# Altium PCB Avalon_ctrlunit.PcbDoc (part 4 of 6)
Units mil, origin at the board's own origin, x right, y up, seen from the top; angles counter-clockwise.
Board outline 3947.62 x 3160.22 mil, 4 copper layers (Top Layer, Mid-Layer 1, Mid-Layer 2, Bottom Layer); 194 components, 260 nets, 936 pads, 465 vias.
Unrouted connection lines stored in the file: 1.
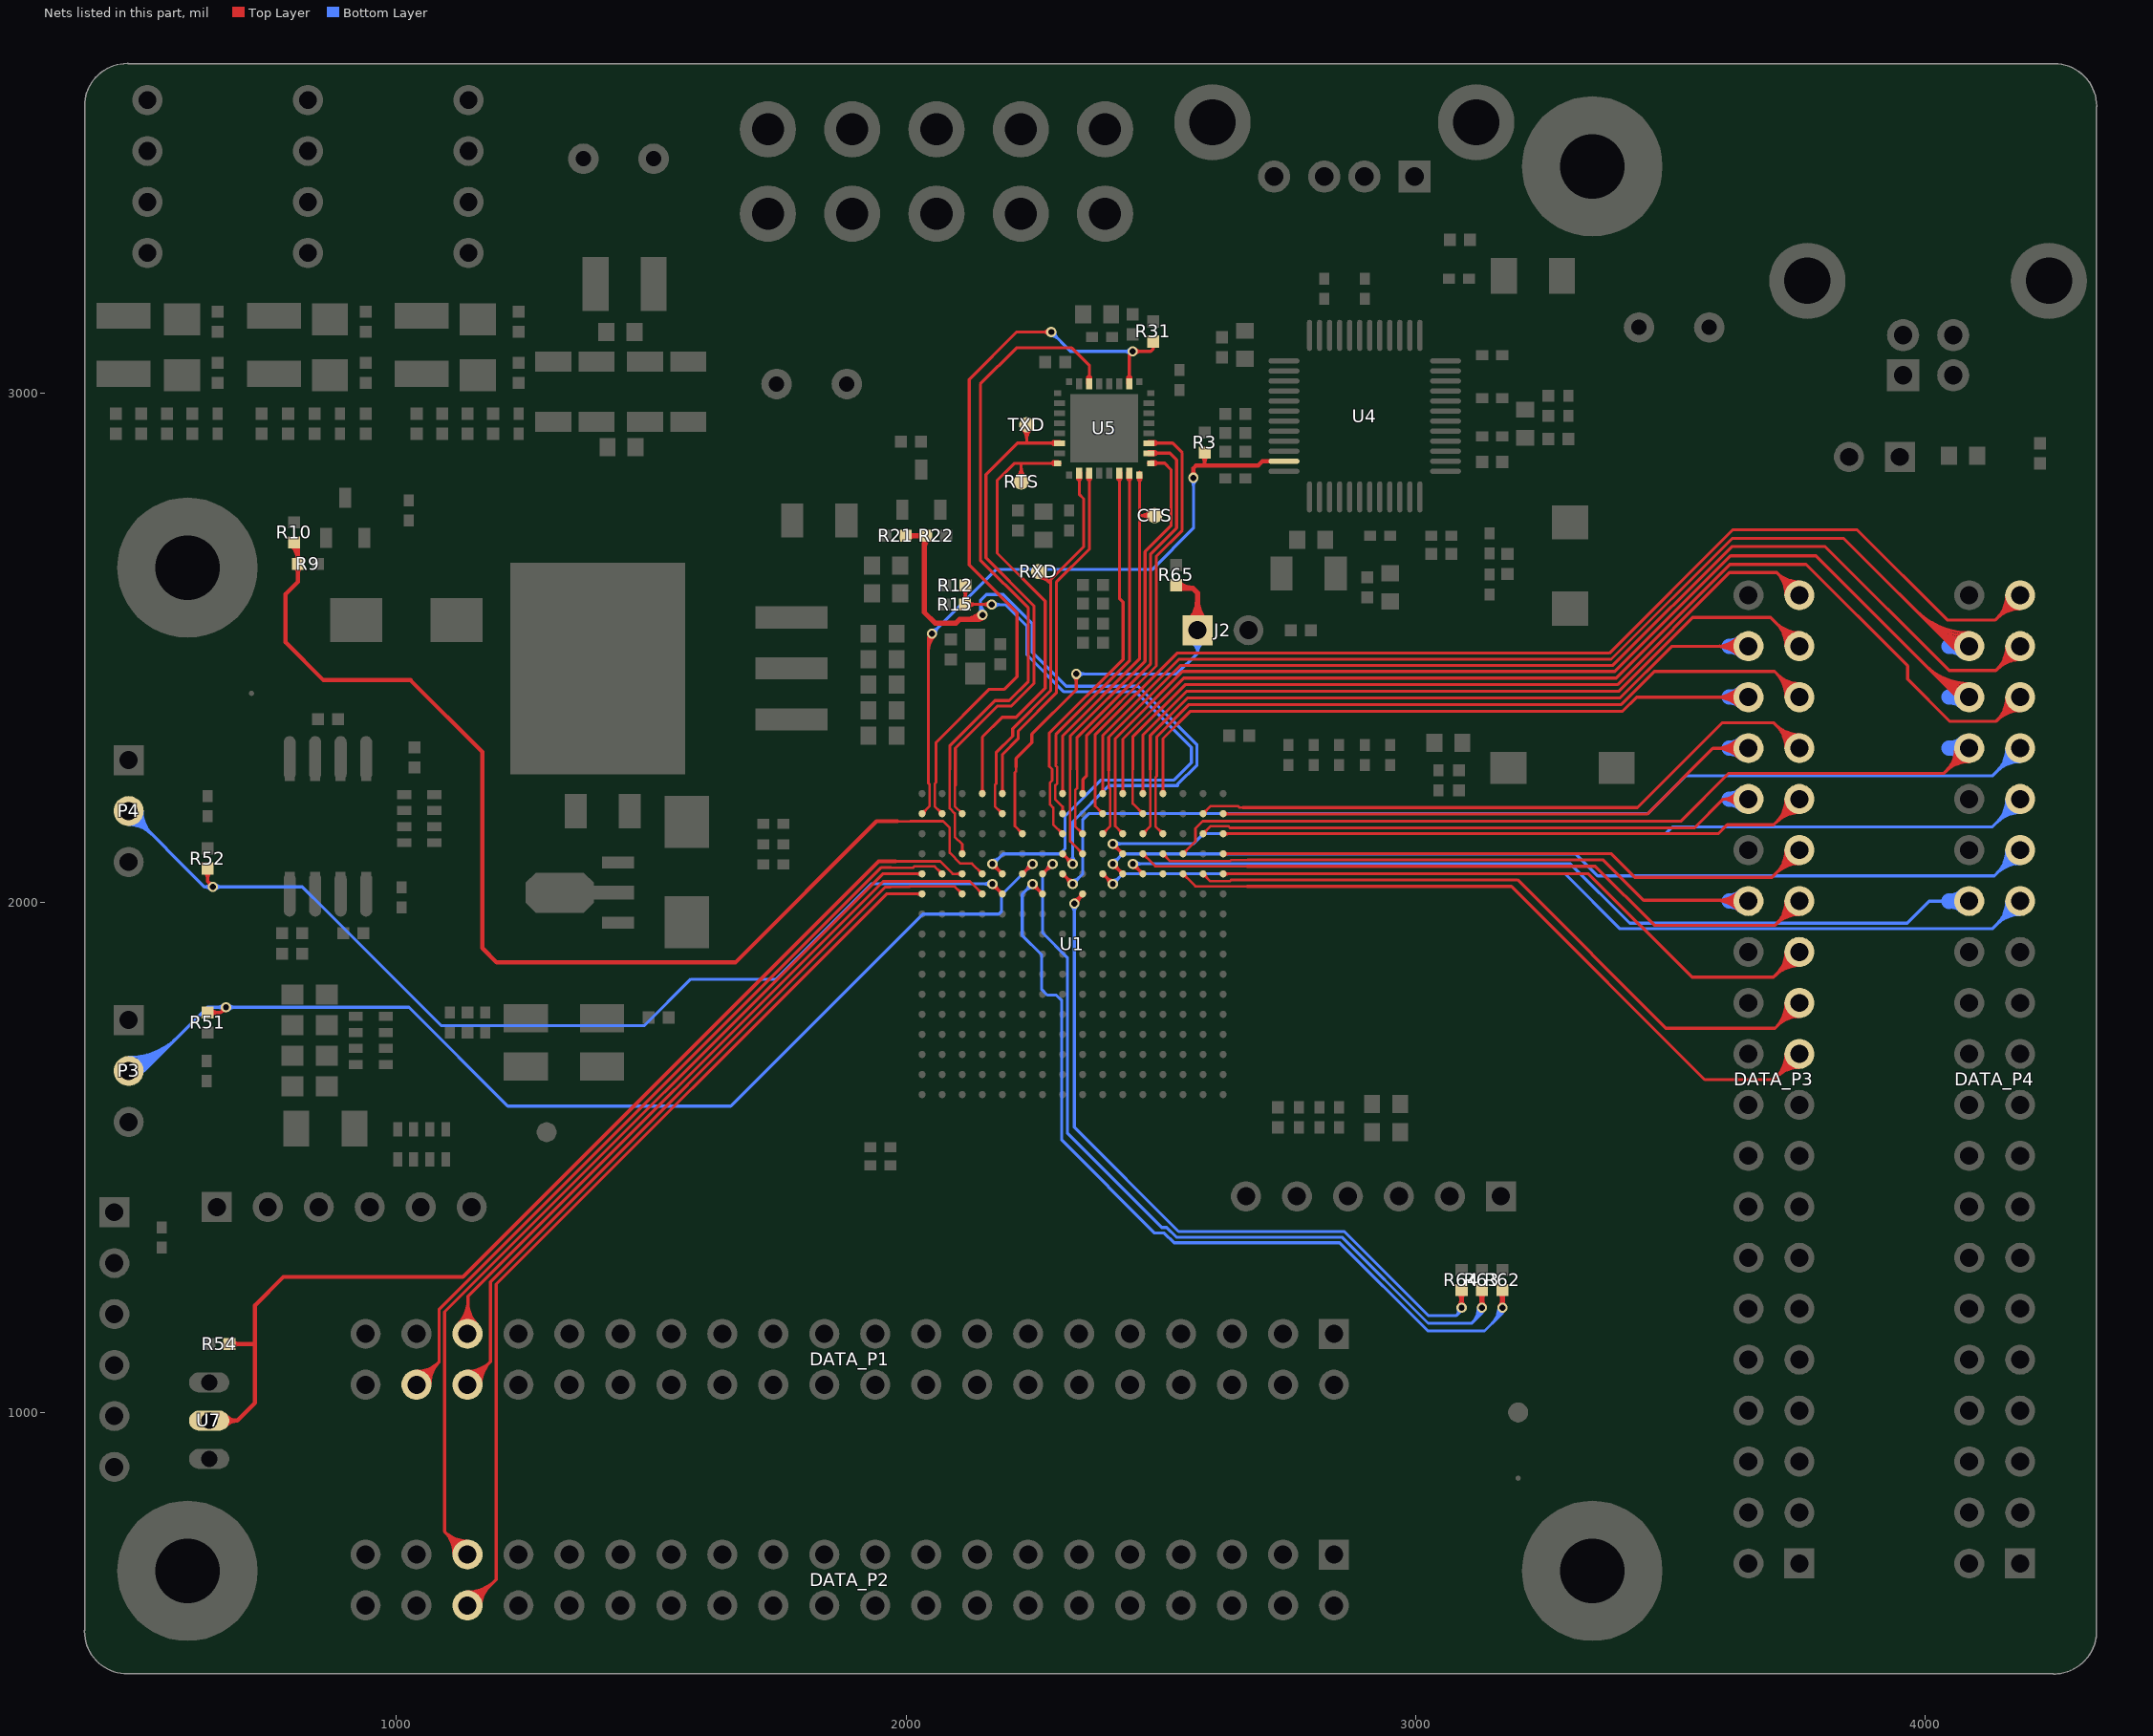
[diagram p6: the nets of this part, all layers, seen from the top]

## Via types
v1: diameter 20, hole 12, Top Layer to Bottom Layer, tented both sides, 334 vias
v2: diameter 32, hole 18, Top Layer to Bottom Layer, tented both sides, 84 vias
v3: diameter 50, hole 28, Top Layer to Bottom Layer, 32 vias
v4: diameter 25.98, hole 12.99, Top Layer to Bottom Layer, tented both sides, 9 vias
v5: diameter 50, hole 28, Top Layer to Bottom Layer, tented both sides, 6 vias

## Nets (pads, with @x,y where several pads share a name; then routed paths per layer and width w, separated by ;. In a path a pad name is that pad's centre, name@x,y a point inside that pad or via, vN(x,y) a via of type N, cw(c..) or ccw(c..) an arc to the next point about the centre after c; other vN are vias at no path point) (continued)
FPGA_L8: R64.2 U1.L8 | length 1585
  Top Layer w6: v1@2329.24,2005.23 ccw(c2326.31,2024.2) U1.L8@2342.93,2014.6 ; v1(2330.31,1998.31) U1.L8@2350,2018 ; v1@2330.31,2005.31 ccw(c2330.31,2022.21) 2342.26,2010.26 ccw(c2354.21,1998.31) v1@2337.31,1998.31 ; v1@2332.53,2004.96 ccw(c2334.18,2009.93) 2338.72,2007.31 ; 2337.92,2005.92 ccw(c2326.41,2017.43) U1.L8@2342.68,2017.43 ; v1@2337.08,2000.13 cw(c2344.22,2002.04) 2337.82,2005.74 ccw(c2344.22,2002.04) v1@2337.08,2000.13
  Top Layer w10: R64.2@3085.18,1235.5 cw(c3073.56,1223.87) 3090,1223.87 cw(c3106.44,1223.87) R64.2@3094.82,1235.5 ; v1@3086.46,1209.17 ccw(c3077.93,1217.7) 3090,1217.7 ccw(c3102.07,1217.7) v1@3093.54,1209.17 ; v1(3090,1205.63) R64.2@3090,1240.31
  Bottom Layer w6: v1@2325.37,1993.37 cw(c2313.42,1981.42) 2330.31,1981.42 cw(c2347.21,1981.42) v1@2335.26,1993.37 ; v1(2330.31,1998.31) 2330.31,1559.69 2535,1355 2860,1355 3025,1190 3080,1190 ; v1@3083.32,1203.53 cw(c3070.49,1199.51) 3080,1190 ; v1(3090,1205.63) 3090,1200 3080,1190
FPGA_L10: R62.2 U1.L10 | length 1840.1
  Top Layer w6: v1@2248.26,2030.11 cw(c2248.26,2013.21) 2260.21,2025.16 cw(c2272.16,2037.11) v1@2255.26,2037.11 ; v1(2248.26,2037.11) U1.L10@2267.94,2017.43 ; U1.L10@2263.94,2017.43 ccw(c2254.29,2017.43) 2261.12,2024.25 ccw(c2267.94,2031.08) U1.L10@2267.94,2021.43
  Top Layer w10: R62.2@3165.18,1235.5 cw(c3153.56,1223.87) 3170,1223.87 cw(c3186.44,1223.87) R62.2@3174.82,1235.5 ; v1@3166.46,1209.17 ccw(c3157.93,1217.7) 3170,1217.7 ccw(c3182.07,1217.7) v1@3173.54,1209.17 ; v1(3170,1205.63) R62.2@3170,1240.31
  Bottom Layer w6: v1@2241.26,2037.11 cw(c2224.36,2037.11) 2236.31,2025.16 cw(c2248.26,2013.21) v1@2248.26,2030.11 ; v1(2248.26,2037.11) 2228,2016.85 2228,1936 2266.26,1897.74 2266.26,1829.74 2277.11,1818.89 2295.09,1818.89 2305.63,1808.35 2305.63,1534.37 2488,1352 2506.89,1352 2525.89,1333 2850.89,1333 3023.89,1160 3135,1160 3170,1195 ; 3150.53,1175.53 ccw(c3120.44,1205.63) v1@3163,1205.63 ; 3160.78,1185.78 ccw(c3140.92,1205.63) v1@3169,1205.63 ; v1@3167.23,1199.2 cw(c3165.43,1195) 3170,1195 ; v1(3170,1205.63) 3170,1195 ; v1@3172.77,1199.2 ccw(c3174.57,1195) 3170,1195
FPGA_L12: P4.2 R52.2 U1.L12 | length 2460.8
  Top Layer w6: R52.2@623.77,2061.08 cw(c608.73,2046.04) 630,2046.04 cw(c651.27,2046.04) R52.2@636.23,2061.08 ; R52.2@630,2067.31 630,2041.63 ; v1@633.36,2032.08 ccw(c621.73,2033.36) 630,2041.63 ; v1@639.55,2038.27 cw(c638.27,2049.9) 630,2041.63 ; v1(640.31,2031.31) 630,2041.63 ; v1@2169.52,2030.11 cw(c2169.52,2013.21) 2181.47,2025.16 cw(c2193.42,2037.11) v1@2176.52,2037.11 ; v1(2169.52,2037.11) U1.L12@2189.2,2017.43 ; U1.L12@2185.2,2017.43 ccw(c2175.55,2017.43) 2182.38,2024.25 ccw(c2189.2,2031.08) U1.L12@2189.2,2021.43
  Bottom Layer w6: P4.2@475,2153.47 cw(c475,2089.43) 520.29,2134.71 cw(c565.57,2180) P4.2@501.53,2180 ; P4.2@475,2159.47 cw(c475,2109.91) 510.04,2144.96 cw(c545.09,2180) P4.2@495.53,2180 ; P4.2@475,2165.47 cw(c475,2130.4) 499.8,2155.2 cw(c524.6,2180) P4.2@489.53,2180 ; P4.2@475,2180 623.69,2031.31 ; v1@635.31,2026.42 ccw(c623.69,2015.06) 623.69,2031.31 ; v1@635.31,2036.21 cw(c623.69,2047.57) 623.69,2031.31 ; v1@645.26,2026.37 cw(c657.21,2014.42) 657.21,2031.31 cw(c657.21,2048.21) v1@645.26,2036.26 ; v1@2164.57,2032.16 ccw(c2152.62,2020.21) 2152.62,2037.11 ccw(c2152.62,2054.01) v1@2164.57,2042.06 ; v1(2169.52,2037.11) 1932.11,2037.11 1745,1850 1578,1850 1487,1759 1088,1759 861,1986 815.69,2031.31 v1(640.31,2031.31) 623.69,2031.31
FPGA_L13: DATA_P1.35 U1.L13 | length 1680.4
  Top Layer w5: 1970,2042 2125.26,2042 U1.L13@2149.83,2017.43 ; U1.L13@2145.33,2017.43 ccw(c2134.47,2017.43) 2142.15,2025.11 ccw(c2149.83,2032.79) U1.L13@2149.83,2021.93
  Top Layer w6: DATA_P1.35@1121.01,1173.12 ccw(c1072.74,1221.39) 1141,1221.39 ; DATA_P1.35@1125.25,1168.88 ccw(c1087.22,1206.9) 1141,1206.9 ; DATA_P1.35@1129.49,1164.63 ccw(c1101.71,1192.42) 1141,1192.42 ; DATA_P1.35@1141,1154.36 1141,1227.92 1955.08,2042 1970,2042 ; 1141,1186.45 ccw(c1171.85,1186.45) DATA_P1.35@1150.04,1164.63 ; 1141,1200.94 ccw(c1186.34,1200.94) DATA_P1.35@1154.28,1168.88 ; 1141,1215.42 ccw(c1200.82,1215.42) DATA_P1.35@1158.52,1173.12
FPGA_L14: DATA_P1.36 U1.L14 | length 1723.7
  Top Layer w5: 1970,2031 2006,2031 2007,2032 2095.89,2032 U1.L14@2110.46,2017.43 ; U1.L14@2105.96,2017.43 ccw(c2095.1,2017.43) 2102.78,2025.11 ccw(c2110.46,2032.79) U1.L14@2110.46,2021.93
  Top Layer w6: DATA_P1.36@1139.76,1054.36 1185,1099.6 ; DATA_P1.36@1139.78,1068.89 ccw(c1139.8,1103.87) 1164.54,1079.13 ccw(c1189.27,1054.4) DATA_P1.36@1154.29,1054.37 ; DATA_P1.36@1139.78,1074.89 ccw(c1139.82,1124.31) 1174.77,1089.37 ccw(c1209.71,1054.42) DATA_P1.36@1160.29,1054.38 ; DATA_P1.36@1139.79,1080.89 ccw(c1139.84,1144.76) 1185,1099.6 ; DATA_P1.36@1166.29,1054.38 cw(c1230.16,1054.43) 1185,1099.6 ; 1970,2031 1959.64,2031 1185,1256.36 1185,1099.6
FPGA_L16: DATA_P2.36 U1.L16 | length 2066.6
  Top Layer w6: DATA_P2.36@1139.76,629.82 ccw(c1139.76,663.75) 1163.76,639.76 ; DATA_P2.36@1139.76,635.82 ccw(c1139.76,684.24) 1174,650 ; DATA_P2.36@1139.76,641.82 ccw(c1139.76,704.72) 1184.24,660.24 ; DATA_P2.36@1139.76,647.82 ccw(c1139.76,725.21) 1194.49,670.49 ; DATA_P2.36@1142.53,618.53 1196,672 1196,1251.8 1961.62,2017.43 U1.L16@2031.72,2017.43 ; DATA_P2.36@1160.29,621.29 cw(c1196.5,621.29) 1170.9,646.9 ; DATA_P2.36@1166.29,621.29 cw(c1216.99,621.29) 1181.14,657.14 ; U1.L16@2028.9,2014.6 ccw(c2022.07,2007.77) 2022.07,2017.43 ccw(c2022.07,2027.08) U1.L16@2028.9,2020.25
FPGA_M1: DATA_P3.25 U1.M1 | length 1483.4
  Top Layer w6: U1.M1@2622.28,2056.8 3339.2,2056.8 3542,1854 3702,1854 DATA_P3.25@3752.17,1904.17 ; U1.M1@2625.1,2053.97 cw(c2631.93,2047.14) 2631.93,2056.8 cw(c2631.93,2066.45) U1.M1@2625.1,2059.62 ; 3705.38,1857.38 cw(c3752.79,1809.97) DATA_P3.25@3752.79,1877.02 ; 3708.38,1860.38 ccw(c3665.22,1903.54) DATA_P3.25@3726.26,1903.54 ; 3715.62,1867.62 cw(c3752.79,1830.45) DATA_P3.25@3752.79,1883.02 ; 3718.62,1870.62 ccw(c3685.71,1903.54) DATA_P3.25@3732.26,1903.54 ; 3725.86,1877.86 cw(c3752.79,1850.94) DATA_P3.25@3752.79,1889.02 ; 3728.87,1880.87 ccw(c3706.19,1903.54) DATA_P3.25@3738.26,1903.54
FPGA_M2: DATA_P3.23 U1.M2 | length 1569.2
  Top Layer w5: U1.M2@2582.91,2052.3 cw(c2582.91,2041.43) 2590.59,2049.11 cw(c2598.27,2056.8) U1.M2@2587.41,2056.8 ; U1.M2@2582.91,2056.8 2597.41,2042.3 2635.3,2042.3 2638,2045 2670,2045
  Top Layer w6: 2670,2045 3200,2045 3491,1754 3705,1754 DATA_P3.23@3753.67,1802.67 ; 3706.26,1755.26 ccw(c3657.98,1803.54) DATA_P3.23@3726.26,1803.54 ; 3710.5,1759.5 cw(c3752.79,1717.21) DATA_P3.23@3752.79,1777.02 ; 3716.5,1765.5 ccw(c3678.46,1803.54) DATA_P3.23@3732.26,1803.54 ; 3720.74,1769.74 cw(c3752.79,1737.7) DATA_P3.23@3752.79,1783.02 ; 3726.75,1775.75 ccw(c3698.95,1803.54) DATA_P3.23@3738.26,1803.54 ; 3730.98,1779.98 cw(c3752.79,1758.18) DATA_P3.23@3752.79,1789.02
FPGA_M3: DATA_P3.21 U1.M3 | length 1648.3
  Top Layer w5: U1.M3@2543.54,2052.3 cw(c2543.54,2041.43) 2551.22,2049.11 cw(c2558.9,2056.8) U1.M3@2548.04,2056.8 ; U1.M3@2543.54,2056.8 2568.04,2032.3 2669,2032.3
  Top Layer w6: 2669,2032.3 3187.7,2032.3 3567,1653 3703,1653 DATA_P3.21@3753.17,1703.17 ; 3706.97,1656.97 ccw(c3660.39,1703.54) DATA_P3.21@3726.26,1703.54 ; 3708.79,1658.79 cw(c3752.79,1614.8) DATA_P3.21@3752.79,1677.02 ; 3717.21,1667.21 ccw(c3680.88,1703.54) DATA_P3.21@3732.26,1703.54 ; 3719.04,1669.04 cw(c3752.79,1635.28) DATA_P3.21@3752.79,1683.02 ; 3727.45,1677.45 ccw(c3701.36,1703.54) DATA_P3.21@3738.26,1703.54 ; 3729.28,1679.28 cw(c3752.79,1655.77) DATA_P3.21@3752.79,1689.02
FPGA_M4: U1.M4
FPGA_M5: DATA_P4.28 U1.M5 | length 1868.1
  Top Layer w6: v1@2445.11,2069.48 cw(c2445.11,2052.58) 2457.06,2064.53 cw(c2469.01,2076.48) v1@2452.11,2076.48 ; v1(2445.11,2076.48) U1.M5@2464.8,2056.8 ; U1.M5@2460.8,2056.8 ccw(c2451.14,2056.8) 2457.97,2063.62 ccw(c2464.8,2070.45) U1.M5@2464.8,2060.8
  Bottom Layer w6: v1(2445.11,2076.48) 3303.52,2076.48 3420,1960 3964,1960 4007,2003 4046,2003 ; v1@2450.06,2071.53 cw(c2462.01,2059.58) 2462.01,2076.48 cw(c2462.01,2093.38) v1@2450.06,2081.43 ; DATA_P4.28@4078,2002 DATA_P4.28@4085,1995
  Bottom Layer w30: 4046,2003 4046.54,2003.54 DATA_P4.28@4085.86,2003.54 ; DATA_P4.28@4075.59,1993.27 ccw(c4050.79,1968.47) 4050.79,2003.54 ccw(c4050.79,2038.62) DATA_P4.28@4075.59,2013.82
FPGA_M6: DATA_P4.29 U1.M6 | length 2156.6
  Top Layer w6: v1@2405.74,2069.48 cw(c2405.74,2052.58) 2417.69,2064.53 cw(c2429.64,2076.48) v1@2412.74,2076.48 ; v1(2405.74,2076.48) U1.M6@2425.43,2056.8 ; U1.M6@2421.43,2056.8 ccw(c2411.77,2056.8) 2418.6,2063.62 ccw(c2425.43,2070.45) U1.M6@2425.43,2060.8
  Bottom Layer w6: v1(2405.74,2076.48) 2425.26,2096 3314,2096 3357,2053 4135.31,2053 DATA_P4.29@4185.86,2103.54 ; v1@2405.74,2083.48 ccw(c2405.74,2100.38) 2417.69,2088.43 ccw(c2429.64,2076.48) v1@2412.74,2076.48 ; DATA_P4.29@4159.33,2103.54 cw(c4095.29,2103.54) 4140.57,2058.26 cw(c4185.86,2012.97) DATA_P4.29@4185.86,2077.02 ; DATA_P4.29@4165.33,2103.54 cw(c4115.77,2103.54) 4150.82,2068.5 cw(c4185.86,2033.46) DATA_P4.29@4185.86,2083.02 ; DATA_P4.29@4171.33,2103.54 cw(c4136.26,2103.54) 4161.06,2078.74 cw(c4185.86,2053.94) DATA_P4.29@4185.86,2089.02
FPGA_M7: DATA_P4.27 U1.M7 | length 2185.3
  Top Layer w6: U1.M7@2386.06,2052.8 cw(c2386.06,2043.14) 2392.88,2049.97 cw(c2399.71,2056.8) U1.M7@2390.06,2056.8 ; U1.M7@2386.06,2056.8 v1(2405.74,2037.11) ; v1@2398.74,2037.11 ccw(c2381.84,2037.11) 2393.79,2049.06 ccw(c2405.74,2061.01) v1@2405.74,2044.11
  Bottom Layer w6: v1(2405.74,2037.11) 2425.63,2057 3293,2057 3401,1949 4131.31,1949 DATA_P4.27@4185.86,2003.54 ; v1@2405.74,2044.11 ccw(c2405.74,2061.01) 2417.69,2049.06 ccw(c2429.64,2037.11) v1@2412.74,2037.11 ; DATA_P4.27@4159.33,2003.54 cw(c4095.29,2003.54) 4140.57,1958.26 cw(c4185.86,1912.97) DATA_P4.27@4185.86,1977.02 ; DATA_P4.27@4165.33,2003.54 cw(c4115.77,2003.54) 4150.82,1968.5 cw(c4185.86,1933.46) DATA_P4.27@4185.86,1983.02 ; DATA_P4.27@4171.33,2003.54 cw(c4136.26,2003.54) 4161.06,1978.74 cw(c4185.86,1953.94) DATA_P4.27@4185.86,1989.02
FPGA_M9: DATA_P4.33 U1.M9 | length 2361.1
  Top Layer w6: U1.M9@2307.32,2052.8 cw(c2307.32,2043.14) 2314.14,2049.97 cw(c2320.97,2056.8) U1.M9@2311.32,2056.8 ; U1.M9@2307.32,2056.8 v1(2327,2037.11) ; v1@2320,2037.11 ccw(c2303.1,2037.11) 2315.05,2049.06 ccw(c2327,2061.01) v1@2327,2044.11
  Bottom Layer w6: v1(2327,2037.11) 2347,2057.11 2347,2163.44 2358.56,2175 3455,2175 3529,2249 4131.31,2249 DATA_P4.33@4185.86,2303.54 ; v1@2327,2044.11 ccw(c2327,2061.01) 2338.95,2049.06 ccw(c2350.9,2037.11) v1@2334,2037.11 ; DATA_P4.33@4159.33,2303.54 cw(c4095.29,2303.54) 4140.57,2258.26 cw(c4185.86,2212.97) DATA_P4.33@4185.86,2277.02 ; DATA_P4.33@4165.33,2303.54 cw(c4115.77,2303.54) 4150.82,2268.5 cw(c4185.86,2233.46) DATA_P4.33@4185.86,2283.02 ; DATA_P4.33@4171.33,2303.54 cw(c4136.26,2303.54) 4161.06,2278.74 cw(c4185.86,2253.94) DATA_P4.33@4185.86,2289.02
FPGA_M10: R63.2 U1.M10 | length 1785
  Top Layer w6: U1.M10@2267.94,2056.8 v1(2287.63,2076.48) ; U1.M10@2267.94,2060.8 ccw(c2267.94,2070.45) 2274.77,2063.62 ccw(c2281.6,2056.8) U1.M10@2271.94,2056.8 ; v1@2280.63,2076.48 cw(c2263.73,2076.48) 2275.68,2064.53 cw(c2287.63,2052.58) v1@2287.63,2069.48
  Top Layer w10: R63.2@3125.18,1235.5 cw(c3113.56,1223.87) 3130,1223.87 cw(c3146.44,1223.87) R63.2@3134.82,1235.5 ; v1@3126.46,1209.17 ccw(c3117.93,1217.7) 3130,1217.7 ccw(c3142.07,1217.7) v1@3133.54,1209.17 ; v1(3130,1205.63) R63.2@3130,1240.31
  Bottom Layer w6: v1@2280.63,2076.48 cw(c2263.73,2076.48) 2275.68,2064.53 cw(c2287.63,2052.58) v1@2287.63,2069.48 ; v1(2287.63,2076.48) 2268,2056.85 2268,1941 2316.63,1892.37 2316.63,1548.37 2502,1363 2511.44,1363 2530.44,1344 2855.44,1344 3024.44,1175 3110,1175 3130,1195 ; 3110.53,1175.53 ccw(c3080.44,1205.63) v1@3123,1205.63 ; 3120.78,1185.78 ccw(c3100.92,1205.63) v1@3129,1205.63 ; v1@3127.23,1199.2 cw(c3125.43,1195) 3130,1195 ; v1(3130,1205.63) 3130,1195 ; v1@3132.77,1199.2 ccw(c3134.57,1195) 3130,1195
FPGA_M11: P3.2 R51.2 U1.M11 | length 2887.1
  Top Layer w6: R51.2@630,1784.69 655.69,1784.69 ; R51.2@636.23,1778.45 cw(c651.27,1763.41) 651.27,1784.69 cw(c651.27,1805.96) R51.2@636.23,1790.92 ; v1@659.04,1794.24 cw(c647.41,1792.96) 655.69,1784.69 ; v1@665.24,1788.04 ccw(c663.96,1776.41) 655.69,1784.69 ; v1(666,1795) 655.69,1784.69 ; U1.M11@2228.57,2056.8 v1(2248.26,2076.48) ; U1.M11@2228.57,2060.8 ccw(c2228.57,2070.45) 2235.4,2063.62 ccw(c2242.23,2056.8) U1.M11@2232.57,2056.8 ; v1@2241.26,2076.48 cw(c2224.36,2076.48) 2236.31,2064.53 cw(c2248.26,2052.58) v1@2248.26,2069.48
  Bottom Layer w6: P3.2@475,1660.53 ccw(c475,1710.09) 510.04,1675.04 ; P3.2@475,1666.53 ccw(c475,1730.57) 520.29,1685.29 ; P3.2@475,1670 505,1670 ; P3.2@475,1672.53 ccw(c475,1751.06) 530.53,1695.53 ; P3.2@475,1678.53 ccw(c475,1771.54) 540.77,1705.77 ; P3.2@475,1684.53 ccw(c475,1792.03) 551.01,1716.01 ; P3.2@475,1690.53 ccw(c475,1812.51) 561.26,1726.26 ; P3.2@475,1696.53 ccw(c475,1833) 571.5,1736.5 ; P3.2@501.33,1666.75 cw(c505,1666.3) 505,1670 ; P3.2@501.33,1673.25 ccw(c505,1673.7) 505,1670 ; v1@661.05,1790.05 ccw(c649.1,1778.1) 649.1,1795 ccw(c649.1,1811.9) v1@661.05,1799.95 ; v1@670.95,1790.05 cw(c682.9,1778.1) 682.9,1795 cw(c682.9,1811.9) v1@670.95,1799.95 ; v1@2241.26,2076.48 cw(c2224.36,2076.48) 2236.31,2064.53 cw(c2248.26,2052.58) v1@2248.26,2069.48 ; v1(2248.26,2076.48) 2187.52,2015.74 2187.52,1983.52 2182,1978 2033,1978 1656,1601 1219,1601 1025,1795 v1(666,1795) 630,1795 505,1670
FPGA_M12: R12.1 R15.1 U1.M12 | length 1419.1
  Top Layer w6: R15.1@2109.45,2591.23 ccw(c2092,2608.69) 2116.69,2608.69 ; R12.1@2110.45,2616.77 cw(c2095.41,2601.73) 2116.68,2601.73 cw(c2137.96,2601.73) R12.1@2122.92,2616.77 ; 2116.68,2603.86 ccw(c2134.54,2603.86) 2121.92,2591.23 ccw(c2134.54,2603.86) 2134.54,2586 ; R12.1@2116.68,2623 2116.68,2586 2167,2586 v1(2168,2585) ; R15.1@2121.92,2578.77 cw(c2139.37,2561.31) 2139.37,2586 ; 2148.69,2586 cw(c2148.69,2565.69) v1@2163.05,2580.05 ; 2153.51,2586 ccw(c2153.51,2599.49) v1@2163.05,2589.95 ; v1@2169.52,2069.48 cw(c2169.52,2052.58) 2181.47,2064.53 cw(c2193.42,2076.48) v1@2176.52,2076.48 ; v1(2169.52,2076.48) U1.M12@2189.2,2056.8 ; U1.M12@2185.2,2056.8 ccw(c2175.55,2056.8) 2182.38,2063.62 ccw(c2189.2,2070.45) U1.M12@2189.2,2060.8
  Bottom Layer w6: v1(2168,2585) 2195,2585 2237,2543 2237,2487 2310,2414 2451,2414 2560,2305 2560,2275 2526,2241 2383,2241 2312,2170 2312,2106 2302,2096 2190.68,2096 2171.16,2076.48 v1(2169.52,2076.48) ; v1@2169.52,2083.48 ccw(c2169.52,2104.34) 2184.27,2089.59 ; v1@2172.95,2580.05 cw(c2184.9,2568.1) 2184.9,2585 cw(c2184.9,2601.9) v1@2172.95,2589.95 ; v1@2176.52,2076.48 cw(c2189.45,2076.48) 2180.31,2085.63
FPGA_M13: R9.1 R10.2 U1.M13 | length 2377.8
  Top Layer w5: 1983,2160 2009,2160 2009.04,2160.04 2072.96,2160.04 2085.96,2147.04 2085.96,2098.04 2107,2077 2129.63,2077 U1.M13@2149.83,2056.8 ; U1.M13@2145.33,2056.8 ccw(c2134.47,2056.8) 2142.15,2064.48 ccw(c2149.83,2072.16) U1.M13@2149.83,2061.3
  Top Layer w8: R10.2@794.48,2701.79 cw(c764.24,2671.56) R9.1@807,2671.56 ; R10.2@800,2709 807,2702 807,2630 783,2606 783,2511.15 857.15,2437 1028.15,2437 1169,2296.15 1169,1911.15 1197.15,1883 1665.17,1883 1942.17,2160 1983,2160 ; R10.2@800.13,2707.45 cw(c783.56,2690.87) 807,2690.87 ; R9.1@801.79,2659.48 cw(c789.22,2646.9) 807,2646.9 ; R9.1@801.79,2670.52 ccw(c789.22,2683.1) 807,2683.1 ; 807,2645.38 cw(c826.93,2645.38) R9.1@812.84,2659.48 ; 807,2684.62 ccw(c826.93,2684.62) R9.1@812.84,2670.52
FPGA_M14: R54.2 U1.M14 U7.2 | length 2204.4
  Top Layer w5: 1979.3,2081.3 2067.1,2081.3 2091.6,2056.8 U1.M14@2110.46,2056.8 ; U1.M14@2107.28,2053.61 ccw(c2099.6,2045.93) 2099.6,2056.8 ccw(c2099.6,2067.66) U1.M14@2107.28,2059.98
  Top Layer w8: U7.2@633,984 688,984 ; U7.2@664.32,973.48 cw(c688,952.09) 688,984 ; U7.2@664.32,994.52 ccw(c688,1015.91) 688,984 ; R54.2@672.69,1134 723,1134 ; R54.2@678.21,1128.48 cw(c691.54,1115.14) 691.54,1134 cw(c691.54,1152.86) R54.2@678.21,1139.52 ; 1979.3,2081.3 1946.3,2081.3 1130.71,1265.71 778.71,1265.71 723,1210 723,1134 ; 688,984 723,1019 723,1134
FPGA_M15: DATA_P1.38 U1.M15 | length 1761.5
  Top Layer w5: 1971,2069 2014,2069 2016.3,2071.3 2056.59,2071.3 U1.M15@2071.09,2056.8 ; U1.M15@2066.59,2056.8 ccw(c2055.73,2056.8) 2063.41,2064.48 ccw(c2071.09,2072.16) U1.M15@2071.09,2061.3
  Top Layer w6: DATA_P1.38@1039.76,1054.36 1084,1098.6 ; DATA_P1.38@1040.01,1068.89 ccw(c1040.56,1102.01) 1063.99,1078.59 ccw(c1087.41,1055.16) DATA_P1.38@1054.29,1054.61 ; DATA_P1.38@1040.11,1074.89 ccw(c1040.89,1121.69) 1073.99,1088.59 ccw(c1107.09,1055.49) DATA_P1.38@1060.29,1054.71 ; DATA_P1.38@1040.21,1080.89 ccw(c1041.22,1141.37) 1084,1098.6 ; DATA_P1.38@1066.29,1054.81 cw(c1126.77,1055.82) 1084,1098.6 ; 1971,2069 1950.97,2069 1084,1202.03 1084,1098.6
FPGA_M16: DATA_P2.35 U1.M16 | length 2032
  Top Layer w6: DATA_P2.35@1113.24,721.51 ccw(c1050.97,722.02) 1095,766.05 ; DATA_P2.35@1119.24,721.46 ccw(c1071.06,721.86) 1105.13,755.93 ccw(c1139.2,790) DATA_P2.35@1139.59,741.82 ; DATA_P2.35@1125.24,721.41 ccw(c1091.14,721.69) 1115.25,745.8 ccw(c1139.36,769.92) DATA_P2.35@1139.64,735.82 ; DATA_P2.35@1139.54,747.82 cw(c1139.03,810.08) 1095,766.05 ; DATA_P2.35@1139.76,721.29 1095,766.06 ; U1.M16@2028.9,2053.97 ccw(c2022.07,2047.14) 2022.07,2056.8 ccw(c2022.07,2066.45) U1.M16@2028.9,2059.62 ; U1.M16@2031.72,2056.8 1954.32,2056.8 1095,1197.47 1095,766.06
FPGA_N1: DATA_P3.29 U1.N1 | length 1420.5
  Top Layer w6: U1.N1@2622.28,2096.17 3383.83,2096.17 3430,2050 3699.24,2050 DATA_P3.29@3752.79,2103.54 ; U1.N1@2625.1,2093.34 cw(c2631.93,2086.51) 2631.93,2096.17 cw(c2631.93,2105.82) U1.N1@2625.1,2098.99 ; DATA_P3.29@3726.26,2103.54 cw(c3662.22,2103.54) 3707.5,2058.26 cw(c3752.79,2012.97) DATA_P3.29@3752.79,2077.02 ; DATA_P3.29@3732.26,2103.54 cw(c3682.7,2103.54) 3717.74,2068.5 cw(c3752.79,2033.46) DATA_P3.29@3752.79,2083.02 ; DATA_P3.29@3738.26,2103.54 cw(c3703.19,2103.54) 3727.99,2078.74 cw(c3752.79,2053.94) DATA_P3.29@3752.79,2089.02
FPGA_N3: DATA_P4.34 U1.N3 | length 1988.6
  Top Layer w5: U1.N3@2543.54,2096.17 2568,2120.63 2568,2146 2582.04,2160.04 2669,2160.04 ; U1.N3@2543.54,2100.67 ccw(c2543.54,2111.53) 2551.22,2103.85 ccw(c2558.9,2096.17) U1.N3@2548.04,2096.17
  Top Layer w6: 2669,2160.04 3520.04,2160.04 3614,2254 4029,2254 4036.32,2254 DATA_P4.34@4085.86,2303.54 ; DATA_P4.34@4059.33,2303.54 cw(c3995.29,2303.54) 4040.57,2258.26 cw(c4085.86,2212.97) DATA_P4.34@4085.86,2277.02 ; DATA_P4.34@4065.33,2303.54 cw(c4015.77,2303.54) 4050.82,2268.5 cw(c4085.86,2233.46) DATA_P4.34@4085.86,2283.02 ; DATA_P4.34@4071.33,2303.54 cw(c4036.26,2303.54) 4061.06,2278.74 cw(c4085.86,2253.94) DATA_P4.34@4085.86,2289.02
  Bottom Layer w30: 4046,2303.54 DATA_P4.34@4085.86,2303.54 ; DATA_P4.34@4075.59,2293.27 ccw(c4050.79,2268.47) 4050.79,2303.54 ccw(c4050.79,2338.62) DATA_P4.34@4075.59,2313.82
FPGA_N4: DATA_P3.28 U1.N4 | length 1531.8
  Top Layer w5: U1.N4@2504.17,2091.67 cw(c2504.17,2080.8) 2511.85,2088.48 cw(c2519.53,2096.17) U1.N4@2508.67,2096.17 ; U1.N4@2504.17,2096.17 2518.67,2081.67 2635.67,2081.67 2638,2084 2670.67,2084
  Top Layer w6: 2670.67,2084 3368,2084 3447,2005 DATA_P3.28@3652.79,2005 ; 3585.23,2005 cw(c3585.23,1935.98) DATA_P3.28@3634.03,1984.79 ; 3592.26,2005 ccw(c3592.26,2064.07) DATA_P3.28@3634.03,2022.3 ; 3599.71,2005 cw(c3599.71,1950.47) DATA_P3.28@3638.27,1989.03 ; 3606.75,2005 ccw(c3606.75,2049.58) DATA_P3.28@3638.27,2018.06 ; 3614.2,2005 cw(c3614.2,1964.95) DATA_P3.28@3642.51,1993.27 ; 3621.23,2005 ccw(c3621.23,2035.1) DATA_P3.28@3642.51,2013.82
  Bottom Layer w30: 3615,2003.54 DATA_P3.28@3652.79,2003.54 ; DATA_P3.28@3642.51,1993.27 ccw(c3617.71,1968.47) 3617.71,2003.54 ccw(c3617.71,2038.62) DATA_P3.28@3642.51,2013.82
FPGA_N5: DATA_P3.27 U1.N5 | length 1616.3
  Top Layer w5: U1.N5@2464.8,2091.67 cw(c2464.8,2080.8) 2472.48,2088.48 cw(c2480.16,2096.17) U1.N5@2469.3,2096.17 ; U1.N5@2464.8,2096.17 2489.3,2071.67 2669,2071.67
  Top Layer w6: 2669,2071.67 3352.33,2071.67 3468,1956 3699,1956 3705.24,1956 DATA_P3.27@3752.79,2003.54 ; DATA_P3.27@3726.26,2003.54 cw(c3662.22,2003.54) 3707.5,1958.26 cw(c3752.79,1912.97) DATA_P3.27@3752.79,1977.02 ; DATA_P3.27@3732.26,2003.54 cw(c3682.7,2003.54) 3717.74,1968.5 cw(c3752.79,1933.46) DATA_P3.27@3752.79,1983.02 ; DATA_P3.27@3738.26,2003.54 cw(c3703.19,2003.54) 3727.99,1978.74 cw(c3752.79,1953.94) DATA_P3.27@3752.79,1989.02
FPGA_N6: DATA_P4.31 U1.N6 | length 2146.1
  Top Layer w6: v1@2405.74,2108.85 cw(c2405.74,2091.95) 2417.69,2103.9 cw(c2429.64,2115.85) v1@2412.74,2115.85 ; v1(2405.74,2115.85) U1.N6@2425.43,2096.17 ; U1.N6@2421.43,2096.17 ccw(c2411.77,2096.17) 2418.6,2102.99 ccw(c2425.43,2109.82) U1.N6@2425.43,2100.17
  Bottom Layer w6: v1(2405.74,2115.85) 2563.85,2115.85 2584,2136 3491,2136 3504,2149 4131.31,2149 DATA_P4.31@4185.86,2203.54 ; v1@2410.69,2110.9 cw(c2422.64,2098.95) 2422.64,2115.85 cw(c2422.64,2132.75) v1@2410.69,2120.8 ; DATA_P4.31@4159.33,2203.54 cw(c4095.29,2203.54) 4140.57,2158.26 cw(c4185.86,2112.97) DATA_P4.31@4185.86,2177.02 ; DATA_P4.31@4165.33,2203.54 cw(c4115.77,2203.54) 4150.82,2168.5 cw(c4185.86,2133.46) DATA_P4.31@4185.86,2183.02 ; DATA_P4.31@4171.33,2203.54 cw(c4136.26,2203.54) 4161.06,2178.74 cw(c4185.86,2153.94) DATA_P4.31@4185.86,2189.02
FPGA_N8: U1.N8 U5.9 | length 931.1
  Top Layer w5: 2322.18,2262 2322.18,2120.67 U1.N8@2346.68,2096.17 ; U1.N8@2342.18,2096.17 ccw(c2331.32,2096.17) 2339,2103.85 ccw(c2346.68,2111.53) U1.N8@2346.68,2100.67
  Top Layer w6: 2322.18,2262 2322.18,2327.1 2469.03,2473.95 2469.03,2689.03 2520,2740 2520,2850 2507.44,2862.56 U5.9@2475.75,2862.56 ; U5.9@2483.57,2860.06 cw(c2489.6,2854.04) 2489.6,2862.56 ; U5.9@2483.57,2864.17 ccw(c2487.47,2868.07) 2487.47,2862.56
  Top Layer w11.81: U5.9@2480.67,2862.56 2488.27,2862.56
FPGA_N9: R21.1 R22.2 U1.N9 | length 1621.8
  Top Layer w6: U1.N9@2307.32,2092.17 cw(c2307.32,2082.51) 2314.14,2089.34 cw(c2320.97,2096.17) U1.N9@2311.32,2096.17 ; U1.N9@2307.32,2096.17 v1(2327,2076.48) ; v1@2320,2076.48 ccw(c2303.1,2076.48) 2315.05,2088.43 ccw(c2327,2100.38) v1@2327,2083.48
  Top Layer w10: R21.1@1999.68,2720 R22.2@2039.31,2720 2036,2716.69 2036,2570 2057,2549 2098,2549 2105,2556 2141,2556 v1(2150,2565) ; R21.1@2004.5,2715.18 cw(c2016.13,2703.56) 2016.13,2720 cw(c2016.13,2736.44) R21.1@2004.5,2724.82 ; R22.2@2034.5,2715.18 ccw(c2022.87,2703.56) 2022.87,2720 ccw(c2022.87,2736.44) R22.2@2034.5,2724.82 ; 2036,2695.55 cw(c2063.76,2695.55) R22.2@2044.13,2715.18 ; 2116.2,2556 ccw(c2116.2,2598.8) v1@2146.46,2568.54 ; 2140.34,2556 ccw(c2140.34,2574.66) v1@2153.54,2561.46 ; v1@2145,2565 cw(c2132.93,2565) 2141.46,2556.46 cw(c2150,2547.93) v1@2150,2560
  Bottom Layer w6: 2146,2577.07 ccw(c2162.07,2577.07) v1@2150.71,2565.71 ; 2146,2591.56 ccw(c2176.56,2591.56) v1@2154.95,2569.95 ; v1(2150,2565) 2146,2569 2146,2593 2158,2605 2190.56,2605 2248,2547.56 2248,2491.56 2314.56,2425 2455.56,2425 2571,2309.56 2571,2270.44 2533,2232.44 2533,2230 2398,2230 2327,2159 v1(2327,2076.48) ; v1@2322.05,2081.43 ccw(c2310.1,2093.38) 2327,2093.38 ccw(c2343.9,2093.38) v1@2331.95,2081.43
FPGA_N14: U1.N14 U5.22 | length 1388.4
  Top Layer w5: 2085.96,2262 2085.96,2185.26 2095.96,2175.26 2095.96,2129.53 2110.46,2115.03 U1.N14@2110.46,2096.17 ; U1.N14@2107.28,2099.35 ccw(c2099.6,2107.03) 2110.46,2107.03 ccw(c2121.33,2107.03) U1.N14@2113.65,2099.35
  Top Layer w6: 2085.96,2262 2085.96,2308.19 2174.77,2397 2202.33,2397 2240,2434.67 2240,2578.33 2146,2672.33 2146,3018 2217,3089 2325.44,3089 2359.61,3054.84 U5.22@2359.61,3014.13 ; U5.22@2357.42,3025.59 ccw(c2352.13,3030.87) 2359.61,3030.87 ; 2359.61,3030.23 ccw(c2366.16,3030.23) U5.22@2361.53,3025.59
  Top Layer w11.81: U5.22@2359.61,3019.05 2359.61,3030.59
FPGA_P1: DATA_P3.31 U1.P1 | length 1407.4
  Top Layer w6: U1.P1@2622.28,2135.54 3593.54,2135.54 3611,2153 3702.24,2153 DATA_P3.31@3752.79,2203.54 ; U1.P1@2625.1,2132.71 cw(c2631.93,2125.88) 2631.93,2135.54 cw(c2631.93,2145.19) U1.P1@2625.1,2138.36 ; DATA_P3.31@3726.26,2203.54 cw(c3662.22,2203.54) 3707.5,2158.26 cw(c3752.79,2112.97) DATA_P3.31@3752.79,2177.02 ; DATA_P3.31@3732.26,2203.54 cw(c3682.7,2203.54) 3717.74,2168.5 cw(c3752.79,2133.46) DATA_P3.31@3752.79,2183.02 ; DATA_P3.31@3738.26,2203.54 cw(c3703.19,2203.54) 3727.99,2178.74 cw(c3752.79,2153.94) DATA_P3.31@3752.79,2189.02
FPGA_P2: DATA_P3.32 U1.P2 | length 1324.2
  Top Layer w5: U1.P2@2582.91,2135.54 2597.41,2150.04 2633,2150.04 2636.04,2147 2669,2147 ; U1.P2@2582.91,2140.04 ccw(c2582.91,2150.9) 2590.59,2143.22 ccw(c2598.27,2135.54) U1.P2@2587.41,2135.54
  Top Layer w6: 2669,2147 3547,2147 3603.54,2203.54 ; DATA_P3.32@3630.63,2188.95 ccw(c3603.55,2171.1) 3603.55,2203.54 ; DATA_P3.32@3630.63,2218.14 cw(c3603.55,2235.98) 3603.55,2203.54 ; DATA_P3.32@3635.65,2192.25 ccw(c3614.68,2178.44) 3614.68,2203.54 ccw(c3614.68,2228.65) DATA_P3.32@3635.65,2214.84 ; DATA_P3.32@3652.79,2203.54 3603.54,2203.54
  Bottom Layer w30: 3615,2203.54 DATA_P3.32@3652.79,2203.54 ; DATA_P3.32@3642.51,2193.27 ccw(c3617.71,2168.47) 3617.71,2203.54 ccw(c3617.71,2238.62) DATA_P3.32@3642.51,2213.82
FPGA_P4: DATA_P3.35 U1.P4 | length 1781.4
  Top Layer w5: 2492,2264.33 2492,2248.33 2489.67,2246 2489.67,2150.04 U1.P4@2504.17,2135.54 ; U1.P4@2499.67,2135.54 ccw(c2488.8,2135.54) 2496.48,2143.22 ccw(c2504.17,2150.9) U1.P4@2504.17,2140.04
  Top Layer w6: 2492,2264.33 2492,2325.8 2555.2,2389 3403.45,2389 3468.45,2454 3702.33,2454 ; 3704,2454 DATA_P3.35@3753.62,2404.38 ; 3706.32,2451.68 cw(c3658.19,2403.54) DATA_P3.35@3726.26,2403.54 ; 3710.35,2447.65 ccw(c3752.79,2490.08) DATA_P3.35@3752.79,2430.07 ; 3716.56,2441.44 cw(c3678.67,2403.54) DATA_P3.35@3732.26,2403.54 ; 3720.59,2437.41 ccw(c3752.79,2469.6) DATA_P3.35@3752.79,2424.07 ; 3726.81,2431.19 cw(c3699.16,2403.54) DATA_P3.35@3738.26,2403.54 ; 3730.84,2427.16 ccw(c3752.79,2449.11) DATA_P3.35@3752.79,2418.07
FPGA_P5: DATA_P3.38 U1.P5 | length 1788.3
  Top Layer w5: U1.P5@2464.8,2135.54 2479.3,2150.04 2479.3,2262 ; U1.P5@2464.8,2140.04 ccw(c2464.8,2150.9) 2472.48,2143.22 ccw(c2480.16,2135.54) U1.P5@2469.3,2135.54
  Top Layer w6: 2479.3,2262 2479.3,2328.65 2552.65,2402 3400.89,2402 3501.89,2503 DATA_P3.38@3652.79,2503 ; 3587.43,2503 ccw(c3587.43,2568.9) DATA_P3.38@3634.03,2522.3 ; 3590.06,2503 cw(c3590.06,2440.81) DATA_P3.38@3634.03,2484.79 ; 3601.92,2503 ccw(c3601.92,2554.41) DATA_P3.38@3638.27,2518.06 ; 3604.54,2503 cw(c3604.54,2455.3) DATA_P3.38@3638.27,2489.03 ; 3616.4,2503 ccw(c3616.4,2539.93) DATA_P3.38@3642.51,2513.82 ; 3619.03,2503 cw(c3619.03,2469.78) DATA_P3.38@3642.51,2493.27
  Bottom Layer w30: 3615,2503.54 DATA_P3.38@3652.79,2503.54 ; DATA_P3.38@3642.51,2493.27 ccw(c3617.71,2468.47) 3617.71,2503.54 ccw(c3617.71,2538.62) DATA_P3.38@3642.51,2513.82
FPGA_P6: DATA_P4.36 U1.P6 | length 2641
  Top Layer w5: 2410.56,2262 2410.56,2150.41 U1.P6@2425.43,2135.54 ; U1.P6@2420.93,2135.54 ccw(c2410.06,2135.54) 2417.74,2143.22 ccw(c2425.43,2150.9) U1.P6@2425.43,2140.04
  Top Layer w6: 2410.56,2262 2410.56,2322.13 2542.42,2454 3390.67,2454 3617.67,2681 3785,2681 4062.46,2403.54 DATA_P4.36@4085.86,2403.54 ; 4000.62,2465.38 ccw(c4085.86,2550.61) DATA_P4.36@4085.86,2430.07 ; 4010.87,2455.13 ccw(c4085.86,2530.12) DATA_P4.36@4085.86,2424.07 ; 4021.11,2444.89 ccw(c4085.86,2509.64) DATA_P4.36@4085.86,2418.07 ; 4031.35,2434.65 ccw(c4085.86,2489.15) DATA_P4.36@4085.86,2412.07 ; 4041.59,2424.41 ccw(c4085.86,2468.67) DATA_P4.36@4085.86,2406.07 ; 4051.84,2414.16 ccw(c4085.86,2448.18) DATA_P4.36@4085.86,2400.07
  Bottom Layer w30: 4046,2403.54 DATA_P4.36@4085.86,2403.54 ; DATA_P4.36@4075.59,2393.27 ccw(c4050.79,2368.47) 4050.79,2403.54 ccw(c4050.79,2438.62) DATA_P4.36@4075.59,2413.82
FPGA_P7: DATA_P4.37 U1.P7 | length 2510.3
  Top Layer w5: U1.P7@2386.06,2135.54 2400.56,2150.04 2400.56,2224 2398,2226.56 2398,2259.44 ; U1.P7@2386.06,2140.04 ccw(c2386.06,2150.9) 2393.74,2143.22 ccw(c2401.42,2135.54) U1.P7@2390.56,2135.54
  Top Layer w6: 2398,2259.44 2398,2325.13 2538.87,2466 3387.11,2466 3620.11,2699 3803.44,2699 4046.44,2456 4138.31,2456 DATA_P4.37@4185.86,2503.54 ; DATA_P4.37@4159.33,2503.54 cw(c4095.29,2503.54) 4140.57,2458.26 cw(c4185.86,2412.97) DATA_P4.37@4185.86,2477.02 ; DATA_P4.37@4165.33,2503.54 cw(c4115.77,2503.54) 4150.82,2468.5 cw(c4185.86,2433.46) DATA_P4.37@4185.86,2483.02 ; DATA_P4.37@4171.33,2503.54 cw(c4136.26,2503.54) 4161.06,2478.74 cw(c4185.86,2453.94) DATA_P4.37@4185.86,2489.02
FPGA_P8: U1.P8 U5.10 | length 926.1
  Top Layer w5: 2335.68,2262 2335.68,2224.49 2332.18,2220.99 2332.18,2150.04 U1.P8@2346.68,2135.54 ; U1.P8@2342.18,2135.54 ccw(c2331.32,2135.54) 2339,2143.22 ccw(c2346.68,2150.9) U1.P8@2346.68,2140.04
  Top Layer w6: 2335.68,2262 2335.68,2325.04 2480.03,2469.39 2480.03,2684.48 2531,2735.44 2531,2869 2517.76,2882.24 U5.10@2471.81,2882.24 ; U5.10@2483.57,2879.75 cw(c2489.6,2873.72) 2489.6,2882.24 ; U5.10@2483.57,2883.86 ccw(c2487.47,2887.75) 2487.47,2882.24
  Top Layer w11.81: U5.10@2476.73,2882.24 2488.27,2882.24
FPGA_P9: U1.P9 U5.6 | length 848.2
  Top Layer w5: 2281,2267.82 2286.82,2262 2286.82,2239.82 2282.82,2235.82 2282.82,2193 2289,2186.82 2289,2153.85 U1.P9@2307.32,2135.54 ; U1.P9@2302.82,2135.54 ccw(c2291.95,2135.54) 2299.63,2143.22 ccw(c2307.32,2150.9) U1.P9@2307.32,2140.04
  Top Layer w6: 2281,2267.82 2281,2332.59 2426,2477.59 2426,2590 2418.66,2597.34 2418.66,2832.32 ; U5.6@2416.47,2836.44 cw(c2411.19,2831.16) 2418.66,2831.16 ; 2418.66,2831.8 cw(c2425.22,2831.8) U5.6@2420.58,2836.44 ; U5.6@2418.66,2848.78 2418.66,2832.32 ; 2418.66,2832.32 ccw(c2413.78,2832.32) 2416.76,2836.19 cw(c2413.78,2832.32) 2418.66,2832.32 ; 2418.66,2832.32 cw(c2424.02,2832.32) 2420.46,2836.33 ccw(c2424.02,2832.32) 2418.66,2832.32
  Top Layer w11.81: 2418.66,2832.32 U5.6@2418.66,2843.86
FPGA_P11: J2.1 R65.1 U1.P11 | length 1129.7
  Top Layer w5: 2216,2266 2216,2258 2213.7,2255.7 2213.7,2150.41 U1.P11@2228.57,2135.54 ; U1.P11@2224.07,2135.54 ccw(c2213.21,2135.54) 2220.89,2143.22 ccw(c2228.57,2150.9) U1.P11@2228.57,2140.04
  Top Layer w6: 2216,2266 2216,2283.14 2246.93,2314.07 2246.93,2330.93 2334,2418 v1(2334,2449) ; v1@2329.05,2444.05 cw(c2317.1,2432.1) 2334,2432.1 cw(c2350.9,2432.1) v1@2338.95,2444.05
  Top Layer w10: R65.1@2530,2617.32 2562.68,2617.32 2572,2608 J2.1@2572,2535 ; R65.1@2534.82,2628.13 ccw(c2560.93,2654.24) 2560.93,2617.32 ; J2.1@2554.66,2552.34 ccw(c2512.79,2594.21) 2572,2594.21 ccw(c2631.21,2594.21) J2.1@2589.34,2552.34 ; J2.1@2561.73,2545.27 ccw(c2536.93,2570.07) 2572,2570.07 ccw(c2607.07,2570.07) J2.1@2582.27,2545.27
  Bottom Layer w6: v1(2334,2449) 2531,2449 2572,2490 ; v1@2338.95,2444.05 cw(c2350.9,2432.1) 2350.9,2449 cw(c2350.9,2465.9) v1@2338.95,2453.95 ; J2.1@2559.16,2511.79 cw(c2547.1,2490) 2572,2490 ; J2.1@2562.06,2517.04 cw(c2552.73,2500.18) 2572,2500.18 cw(c2591.27,2500.18) J2.1@2581.94,2517.04 ; J2.1@2572,2535 2572,2490 ; J2.1@2584.84,2511.79 ccw(c2596.9,2490) 2572,2490
FPGA_R1: DATA_P3.34 U1.R1 | length 1425.9
  Top Layer w6: U1.R1@2622.28,2174.91 2623.18,2174 3454,2174 3583,2303 DATA_P3.34@3652.79,2303 ; U1.R1@2625.1,2172.08 cw(c2629.75,2167.43) 2629.75,2174 ; U1.R1@2625.1,2177.73 ccw(c2634.12,2186.75) 2634.12,2174 ; 3587.43,2303 ccw(c3587.43,2368.9) DATA_P3.34@3634.03,2322.3 ; 3590.06,2303 cw(c3590.06,2240.81) DATA_P3.34@3634.03,2284.79 ; 3601.92,2303 ccw(c3601.92,2354.41) DATA_P3.34@3638.27,2318.06 ; 3604.54,2303 cw(c3604.54,2255.3) DATA_P3.34@3638.27,2289.03 ; 3616.4,2303 ccw(c3616.4,2339.93) DATA_P3.34@3642.51,2313.82 ; 3619.03,2303 cw(c3619.03,2269.78) DATA_P3.34@3642.51,2293.27
  Bottom Layer w30: 3615,2303.54 DATA_P3.34@3652.79,2303.54 ; DATA_P3.34@3642.51,2293.27 ccw(c3617.71,2268.47) 3617.71,2303.54 ccw(c3617.71,2338.62) DATA_P3.34@3642.51,2313.82
FPGA_R2: DATA_P3.33 U1.R2 | length 1516.9
  Top Layer w5: U1.R2@2582.91,2174.91 2597.78,2189.78 2651.22,2189.78 2654,2187 2661,2187 ; U1.R2@2582.91,2179.41 ccw(c2582.91,2190.27) 2590.59,2182.59 ccw(c2598.27,2174.91) U1.R2@2587.41,2174.91
  Top Layer w6: 2661,2187 3435,2187 3601,2353 3703,2353 DATA_P3.33@3752.62,2303.38 ; 3706.94,2349.06 ccw(c3752.79,2394.91) DATA_P3.33@3752.79,2330.07 ; 3707.74,2348.26 cw(c3663.02,2303.54) DATA_P3.33@3726.26,2303.54 ; 3717.18,2338.82 ccw(c3752.79,2374.43) DATA_P3.33@3752.79,2324.07 ; 3717.98,2338.02 cw(c3683.5,2303.54) DATA_P3.33@3732.26,2303.54 ; 3727.42,2328.58 ccw(c3752.79,2353.94) DATA_P3.33@3752.79,2318.07 ; 3728.22,2327.78 cw(c3703.99,2303.54) DATA_P3.33@3738.26,2303.54
FPGA_R5: DATA_P3.39 U1.R5 | length 1862.7
  Top Layer w5: 2445,2262 2445,2194.7 U1.R5@2464.8,2174.91 ; U1.R5@2460.3,2174.91 ccw(c2449.43,2174.91) 2457.11,2182.59 ccw(c2464.8,2190.27) U1.R5@2464.8,2179.41
  Top Layer w6: 2445,2262 2445,2325.47 2547.53,2428 3395.78,2428 3615.78,2648 3708.33,2648 ; DATA_P3.39@3726.26,2603.89 ccw(c3665.03,2604.7) 3708.33,2648 ; DATA_P3.39@3732.26,2603.81 ccw(c3684.88,2604.44) 3718.39,2637.94 ccw(c3751.89,2671.45) DATA_P3.39@3752.52,2624.07 ; DATA_P3.39@3738.26,2603.73 ccw(c3704.73,2604.18) 3728.44,2627.89 ccw(c3752.15,2651.6) DATA_P3.39@3752.6,2618.07 ; DATA_P3.39@3752.44,2630.07 cw(c3751.63,2691.3) 3708.33,2648 ; DATA_P3.39@3752.79,2603.54 3708.33,2648
FPGA_R7: DATA_P4.39 U1.R7 | length 2486.3
  Top Layer w5: 2371,2262 2371,2189.96 U1.R7@2386.06,2174.91 ; U1.R7@2381.56,2174.91 ccw(c2370.69,2174.91) 2378.37,2182.59 ccw(c2386.06,2190.27) U1.R7@2386.06,2179.41
  Top Layer w6: 2371,2262 2371,2329.25 2531.75,2490 3380,2490 3622,2732 3865.99,2732 4042.99,2555 4137.31,2555 DATA_P4.39@4185.86,2603.54 ; DATA_P4.39@4159.33,2603.54 cw(c4095.29,2603.54) 4140.57,2558.26 cw(c4185.86,2512.97) DATA_P4.39@4185.86,2577.02 ; DATA_P4.39@4165.33,2603.54 cw(c4115.77,2603.54) 4150.82,2568.5 cw(c4185.86,2533.46) DATA_P4.39@4185.86,2583.02 ; DATA_P4.39@4171.33,2603.54 cw(c4136.26,2603.54) 4161.06,2578.74 cw(c4185.86,2553.94) DATA_P4.39@4185.86,2589.02
FPGA_R9: U1.R9 U5.7 | length 800.1
  Top Layer w5: 2294,2273 2294,2269 2296.82,2266.18 2296.82,2234 2292.82,2230 2292.82,2203.18 2307.32,2188.68 U1.R9@2307.32,2174.91 ; U1.R9@2304.13,2178.09 ccw(c2296.45,2185.77) 2307.32,2185.77 ccw(c2318.18,2185.77) U1.R9@2310.5,2178.09
  Top Layer w6: 2294,2273 2294,2330.03 2438.35,2474.38 2438.35,2832.32 ; U5.7@2436.16,2836.44 cw(c2430.87,2831.16) 2438.35,2831.16 ; 2438.35,2831.8 cw(c2444.9,2831.8) U5.7@2440.27,2836.44 ; U5.7@2438.35,2848.78 2438.35,2832.32 ; 2438.35,2832.32 ccw(c2433.46,2832.32) 2436.44,2836.19 cw(c2433.46,2832.32) 2438.35,2832.32 ; 2438.35,2832.32 cw(c2443.7,2832.32) 2440.14,2836.33 ccw(c2443.7,2832.32) 2438.35,2832.32
  Top Layer w11.81: 2438.35,2832.32 U5.7@2438.35,2843.86
FPGA_R12: RXD.1 U1.R12 U5.2 | length 877.5
  Top Layer w5: 2177,2234 2174.7,2231.7 2174.7,2189.41 U1.R12@2189.2,2174.91 ; U1.R12@2184.7,2174.91 ccw(c2173.84,2174.91) 2181.52,2182.59 ccw(c2189.2,2190.27) U1.R12@2189.2,2179.41
  Top Layer w6: 2177,2234 2177,2294.56 2209.44,2327 2209.44,2341.89 2284,2416.44 2284,2626 ; RXD.1@2260,2638 cw(c2260,2609.03) 2280.49,2629.51 cw(c2300.97,2650) RXD.1@2272,2650 ; RXD.1@2265,2655 2265,2645 2284,2626 ; U5.2@2337.73,2836.44 cw(c2332.45,2831.16) 2339.92,2831.16 ; 2339.92,2831.8 cw(c2346.48,2831.8) U5.2@2341.84,2836.44 ; U5.2@2339.92,2848.78 2339.92,2801.58 2348.61,2792.89 2348.61,2698.61 2284,2634 2284,2626
  Top Layer w11.81: 2339.92,2832.32 U5.2@2339.92,2843.86
FPGA_R14: TXD.1 U1.R14 U5.30 | length 1069.8
  Top Layer w5: 2097,2231 2095.96,2229.96 2095.96,2189.41 U1.R14@2110.46,2174.91
  Top Layer w6: 2097,2231 2097,2303.67 2179.33,2386 2206.89,2386 2251,2430.11 2251,2582.89 2157,2676.89 2157,2840.36 2218.57,2901.93 2237,2901.93 ; TXD.1@2228.51,2929.51 cw(c2208.03,2909.03) 2237,2909.03 cw(c2265.97,2909.03) TXD.1@2245.49,2929.51 ; TXD.1@2237,2938 2237,2901.93 ; 2288.4,2901.93 cw(c2288.4,2893.41) U5.30@2294.43,2899.43 ; 2290.53,2901.93 ccw(c2290.53,2907.44) U5.30@2294.43,2903.54 ; U5.30@2306.46,2901.93 2237,2901.93
  Top Layer w11.81: 2290,2901.93 U5.30@2301.54,2901.93
FPGA_R15: R31.1 U1.R15 U5.18 | length 1639.6
  Top Layer w5: 2059,2236 2056.59,2233.59 2056.59,2189.41 U1.R15@2071.09,2174.91 ; U1.R15@2066.59,2174.91 ccw(c2055.73,2174.91) 2063.41,2182.59 ccw(c2071.09,2190.27) U1.R15@2071.09,2179.41
  Top Layer w6: 2059,2236 2059,2314.56 2163.44,2419 2193.22,2419 2218,2443.78 2218,2569.22 2124,2663.22 2124,3027.11 2216.89,3120 v1(2285,3120) ; v1@2280.05,3115.05 ccw(c2268.1,3103.1) 2268.1,3120 ccw(c2268.1,3136.9) v1@2280.05,3124.95 ; 2438,3031.06 ccw(c2445.74,3031.06) 2440.27,3025.59 cw(c2445.44,3030.94) 2438,3030.94 2438,3075 v1(2445,3082) 2480,3082 2485,3087 ; v1@2449.95,3077.05 cw(c2461.9,3065.1) 2461.9,3082 cw(c2461.9,3098.9) v1@2449.95,3086.95 ; R31.1@2481.03,3093.45 cw(c2477.78,3087) 2485,3087 ; R31.1@2485,3101.32 2485,3087 ; R31.1@2488.97,3093.45 ccw(c2492.22,3087) 2485,3087 ; U5.18@2436.16,3025.59 ccw(c2431.71,3030.04) 2438,3030.04 cw(c2431.71,3030.04) U5.18@2436.16,3025.59
  Top Layer w11.81: U5.18@2438.35,3019.05 2438.35,3030.59
  Bottom Layer w6: v1@2285,3113 cw(c2285,3096.1) 2296.95,3108.05 cw(c2308.9,3120) v1@2292,3120 ; v1(2285,3120) 2323,3082 v1(2445,3082) ; v1@2440.05,3077.05 ccw(c2428.1,3065.1) 2428.1,3082 ccw(c2428.1,3098.9) v1@2440.05,3086.95
FPGA_R16: R3.2 U1.R16 U4.47 | length 1463.3
  Top Layer w5: U1.R16@2031.72,2174.91 2046.22,2189.41 2046.22,2232.78 2044,2235 ; U1.R16@2031.72,2179.41 ccw(c2031.72,2190.27) 2039.41,2182.59 ccw(c2047.09,2174.91) U1.R16@2036.22,2174.91
  Top Layer w6: 2044,2235 2044,2521 v1(2051,2528) ; 2044,2494.2 cw(c2084.8,2494.2) v1@2055.95,2523.05 ; 2044,2508.69 cw(c2070.31,2508.69) v1@2051.71,2527.29
  Top Layer w8: v1@2559.76,2838.24 ccw(c2549.51,2848.49) 2564,2848.49 ccw(c2578.49,2848.49) v1@2568.24,2838.24 ; v1(2564,2834) 2564,2853 2569,2858 2586,2858 ; R3.2@2580.48,2877.79 cw(c2567.14,2864.46) 2586,2864.46 cw(c2604.86,2864.46) R3.2@2591.52,2877.79 ; R3.2@2586,2883.31 2586,2858 ; U4.47@2741.54,2866.42 2699.42,2866.42 2691,2858 2586,2858
  Bottom Layer w6: v1(2051,2528) 2177,2654 2483,2654 2564,2735 v1(2564,2834) ; v1@2051,2535 ccw(c2051,2551.9) 2062.95,2539.95 ccw(c2074.9,2528) v1@2058,2528 ; v1@2559.05,2829.05 cw(c2547.1,2817.1) 2564,2817.1 cw(c2580.9,2817.1) v1@2568.95,2829.05
FPGA_T4: DATA_P3.36 U1.T4 | length 1631.9
  Top Layer w6: U1.T4@2501.34,2217.1 ccw(c2494.51,2223.93) 2504.17,2223.93 ccw(c2513.82,2223.93) U1.T4@2506.99,2217.1 ; U1.T4@2504.17,2214.28 2504.17,2322.41 2557.76,2376 3406.01,2376 3433.55,2403.54 DATA_P3.36@3652.79,2403.54 ; DATA_P3.36@3634.03,2384.79 ccw(c3588.74,2339.5) 3588.74,2403.54 ccw(c3588.74,2467.59) DATA_P3.36@3634.03,2422.3 ; DATA_P3.36@3638.27,2389.03 ccw(c3603.23,2353.99) 3603.23,2403.54 ccw(c3603.23,2453.1) DATA_P3.36@3638.27,2418.06 ; DATA_P3.36@3642.51,2393.27 ccw(c3617.71,2368.47) 3617.71,2403.54 ccw(c3617.71,2438.62) DATA_P3.36@3642.51,2413.82
  Bottom Layer w30: 3615,2403.54 DATA_P3.36@3652.79,2403.54 ; DATA_P3.36@3642.51,2393.27 ccw(c3617.71,2368.47) 3617.71,2403.54 ccw(c3617.71,2438.62) DATA_P3.36@3642.51,2413.82
FPGA_T5: DATA_P3.37 U1.T5 | length 1770.9
  Top Layer w6: U1.T5@2461.97,2217.1 ccw(c2455.14,2223.93) 2464.8,2223.93 ccw(c2474.45,2223.93) U1.T5@2467.62,2217.1 ; U1.T5@2464.8,2214.28 2464.8,2329.7 2550.09,2415 3398.34,2415 3543.34,2560 3693,2560 3696.33,2560 DATA_P3.37@3752.79,2503.54 ; DATA_P3.37@3726.26,2503.54 ccw(c3662.22,2503.54) 3707.5,2548.83 ccw(c3752.79,2594.11) DATA_P3.37@3752.79,2530.07 ; DATA_P3.37@3732.26,2503.54 ccw(c3682.7,2503.54) 3717.74,2538.59 ccw(c3752.79,2573.63) DATA_P3.37@3752.79,2524.07 ; DATA_P3.37@3738.26,2503.54 ccw(c3703.19,2503.54) 3727.99,2528.34 ccw(c3752.79,2553.14) DATA_P3.37@3752.79,2518.07
FPGA_T6: DATA_P4.35 U1.T6 | length 2420.7
  Top Layer w6: U1.T6@2422.6,2217.1 ccw(c2415.77,2223.93) 2425.43,2223.93 ccw(c2435.08,2223.93) U1.T6@2428.25,2217.1 ; U1.T6@2425.43,2214.28 2425.43,2321.45 2544.98,2441 3393.23,2441 3616.23,2664 3766,2664 3965,2465 3965,2439 4048,2356 4138.31,2356 DATA_P4.35@4185.86,2403.54 ; DATA_P4.35@4159.33,2403.54 cw(c4095.29,2403.54) 4140.57,2358.26 cw(c4185.86,2312.97) DATA_P4.35@4185.86,2377.02 ; DATA_P4.35@4165.33,2403.54 cw(c4115.77,2403.54) 4150.82,2368.5 cw(c4185.86,2333.46) DATA_P4.35@4185.86,2383.02 ; DATA_P4.35@4171.33,2403.54 cw(c4136.26,2403.54) 4161.06,2378.74 cw(c4185.86,2353.94) DATA_P4.35@4185.86,2389.02
FPGA_T7: DATA_P4.38 U1.T7 | length 2795.3
  Top Layer w6: U1.T7@2383.23,2217.1 ccw(c2376.4,2223.93) 2386.06,2223.93 ccw(c2395.71,2223.93) U1.T7@2388.88,2217.1 ; U1.T7@2386.06,2214.28 2386.06,2328.75 2535.31,2478 3383.56,2478 3620.56,2715 3840,2715 4054,2501 ; 3981.85,2573.15 ccw(c4085.86,2677.17) DATA_P4.38@4085.86,2530.07 ; 3992.09,2562.91 ccw(c4085.86,2656.68) DATA_P4.38@4085.86,2524.07 ; 4002.33,2552.67 ccw(c4085.86,2636.2) DATA_P4.38@4085.86,2518.07 ; 4012.57,2542.43 ccw(c4085.86,2615.71) DATA_P4.38@4085.86,2512.07 ; 4022.82,2532.18 ccw(c4085.86,2595.23) DATA_P4.38@4085.86,2506.07 ; 4033.06,2521.94 ccw(c4085.86,2574.74) DATA_P4.38@4085.86,2500.07 ; 4043.3,2511.7 ccw(c4085.86,2554.26) DATA_P4.38@4085.86,2494.07 ; 4053.54,2501.46 ccw(c4085.86,2533.77) DATA_P4.38@4085.86,2488.07 ; DATA_P4.38@4059.44,2505.96 cw(c4054,2506.46) 4054,2501 ; DATA_P4.38@4060.36,2496.21 ccw(c4054,2494.38) 4054,2501 ; DATA_P4.38@4085.86,2501 4054,2501
  Bottom Layer w30: 4046,2503.54 DATA_P4.38@4085.86,2503.54 ; DATA_P4.38@4075.59,2493.27 ccw(c4050.79,2468.47) 4050.79,2503.54 ccw(c4050.79,2538.62) DATA_P4.38@4075.59,2513.82
FPGA_T8: U1.T8 U5.11 | length 865.4
  Top Layer w6: U1.T8@2343.86,2217.1 ccw(c2335.82,2225.14) 2347.18,2225.14 ; U1.T8@2346.68,2214.28 2347.18,2214.78 2347.18,2242 2354,2248.82 2354,2327.8 2491.03,2464.84 2491.03,2679.92 2542,2730.89 2542,2883 2523.07,2901.93 U5.11@2471.81,2901.93 ; 2347.18,2222.73 ccw(c2355.13,2222.73) U1.T8@2349.51,2217.1 ; U5.11@2483.57,2899.43 cw(c2489.6,2893.41) 2489.6,2901.93 ; U5.11@2483.57,2903.54 ccw(c2487.47,2907.44) 2487.47,2901.93
  Top Layer w11.81: U5.11@2476.73,2901.93 2488.27,2901.93
FPGA_T9: CTS.1 U1.T9 U5.8 | length 802.3
  Top Layer w6: U1.T9@2304.49,2217.1 ccw(c2297.66,2223.93) 2307.32,2223.93 ccw(c2316.97,2223.93) U1.T9@2310.14,2217.1 ; U1.T9@2307.32,2214.28 2307.32,2327.79 2458.03,2478.5 2458.03,2760 ; U5.8@2455.84,2836.44 cw(c2450.56,2831.16) 2458.03,2831.16 ; 2458.03,2831.8 cw(c2464.59,2831.8) U5.8@2459.95,2836.44 ; U5.8@2458.03,2844.84 2458.03,2760 ; CTS.1@2479.51,2751.51 ccw(c2459.03,2731.03) 2459.03,2760 ccw(c2459.03,2788.97) CTS.1@2479.51,2768.49 ; CTS.1@2488,2760 2458.03,2760
  Top Layer w11.81: 2458.34,2831.75 U5.8@2458.34,2839.35
FPGA_T12: U1.T12 U5.3 | length 742.8
  Top Layer w6: U1.T12@2186.38,2217.1 ccw(c2179.55,2223.93) 2189.2,2223.93 ccw(c2198.86,2223.93) U1.T12@2192.03,2217.1 ; U1.T12@2189.2,2214.28 2189.2,2291.2 2220.44,2322.44 2220.44,2337.33 2295,2411.89 2295,2629 2359.61,2693.61 U5.3@2359.61,2848.78 ; U5.3@2357.42,2836.44 cw(c2352.13,2831.16) 2359.61,2831.16 ; 2359.61,2831.8 cw(c2366.16,2831.8) U5.3@2361.53,2836.44
  Top Layer w11.81: 2359.61,2832.32 U5.3@2359.61,2843.86
FPGA_T13: RTS.1 U1.T13 U5.32 | length 982.7
  Top Layer w6: U1.T13@2147.01,2217.1 ccw(c2140.18,2223.93) 2149.83,2223.93 ccw(c2159.49,2223.93) U1.T13@2152.66,2217.1 ; U1.T13@2149.83,2214.28 2149.83,2325.39 2188.44,2364 2216,2364 2273,2421 2273,2592 2179,2686 2179,2829 2212,2862 2227,2862 ; RTS.1@2217.51,2834.27 ccw(c2197.03,2854.76) 2226,2854.76 ccw(c2254.97,2854.76) RTS.1@2234.49,2834.27 ; RTS.1@2226,2817 2226,2861 2227,2862 ; 2289.18,2862 ccw(c2289.18,2869.42) U5.32@2294.43,2864.17 ; 2289.75,2862 cw(c2289.75,2855.39) U5.32@2294.43,2860.06 ; U5.32@2302.52,2862 2227,2862
  Top Layer w11.81: 2290,2862.56 U5.32@2297.6,2862.56